# Altium PCB SerialBoard.PcbDoc
Units mil, origin at the board's own origin, x right, y up, seen from the top; angles counter-clockwise.
Board outline 2850 x 1640 mil, 2 copper layers (Top Layer, Bottom Layer); 27 components, 37 nets, 157 pads, 16 vias.
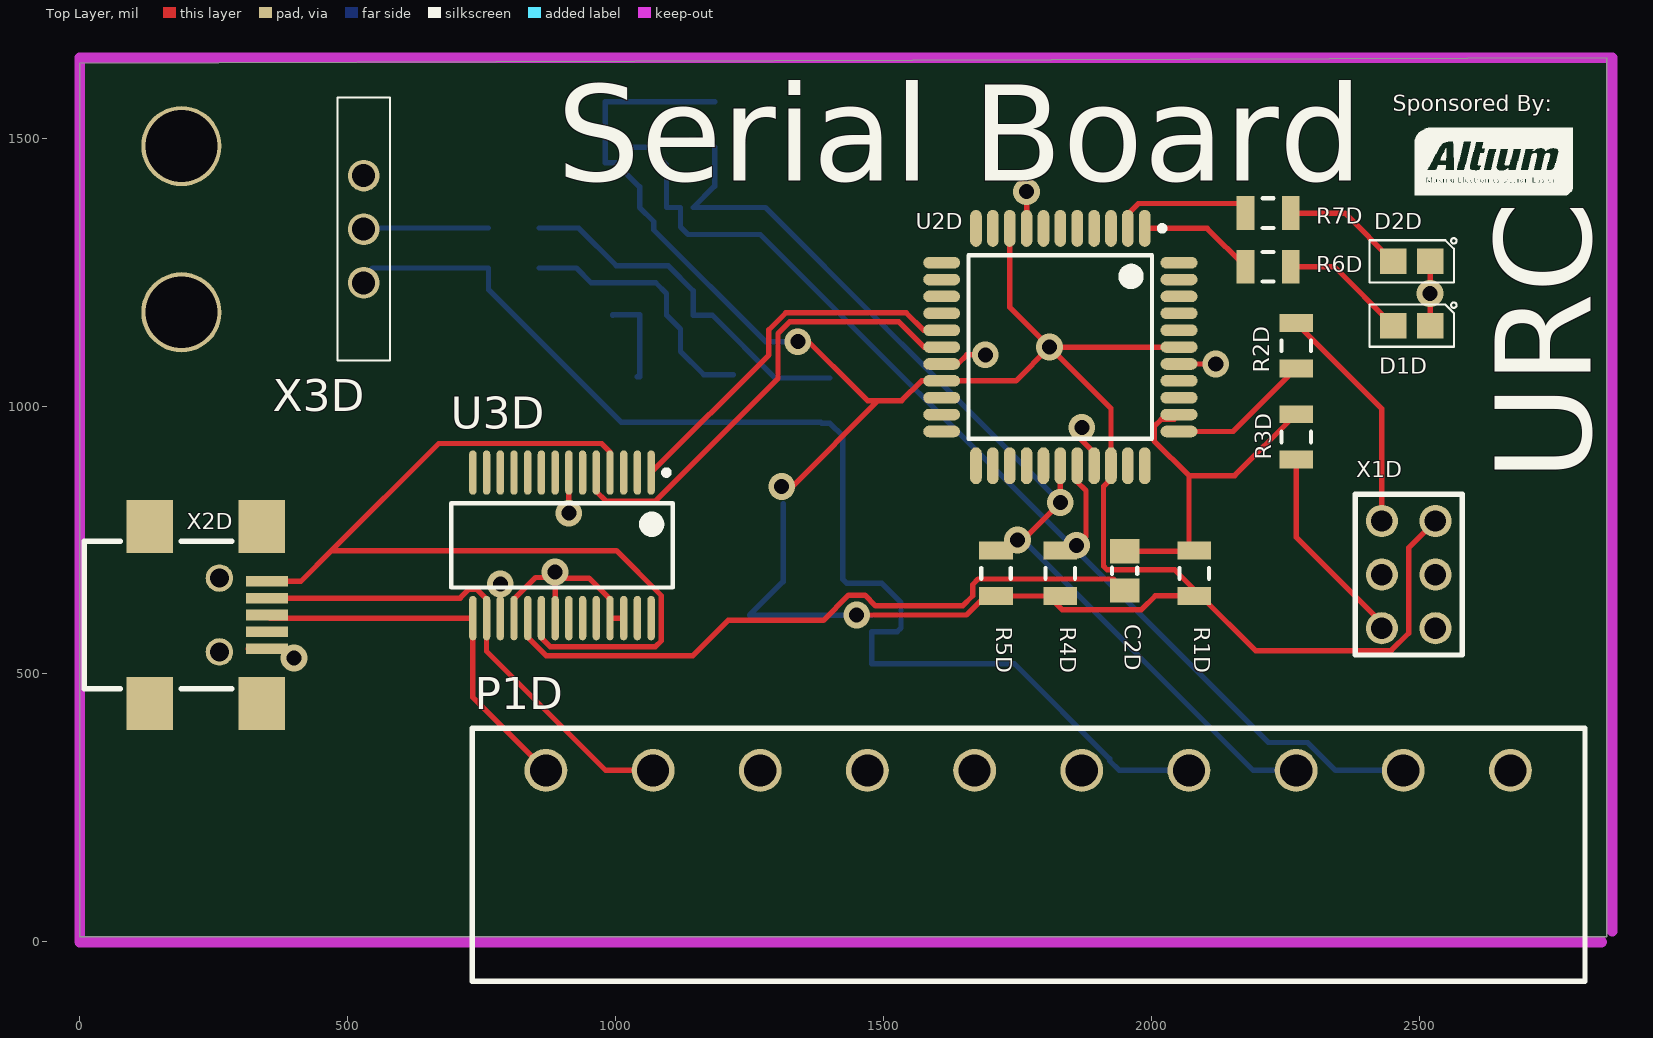
[diagram p0: Top Layer view]
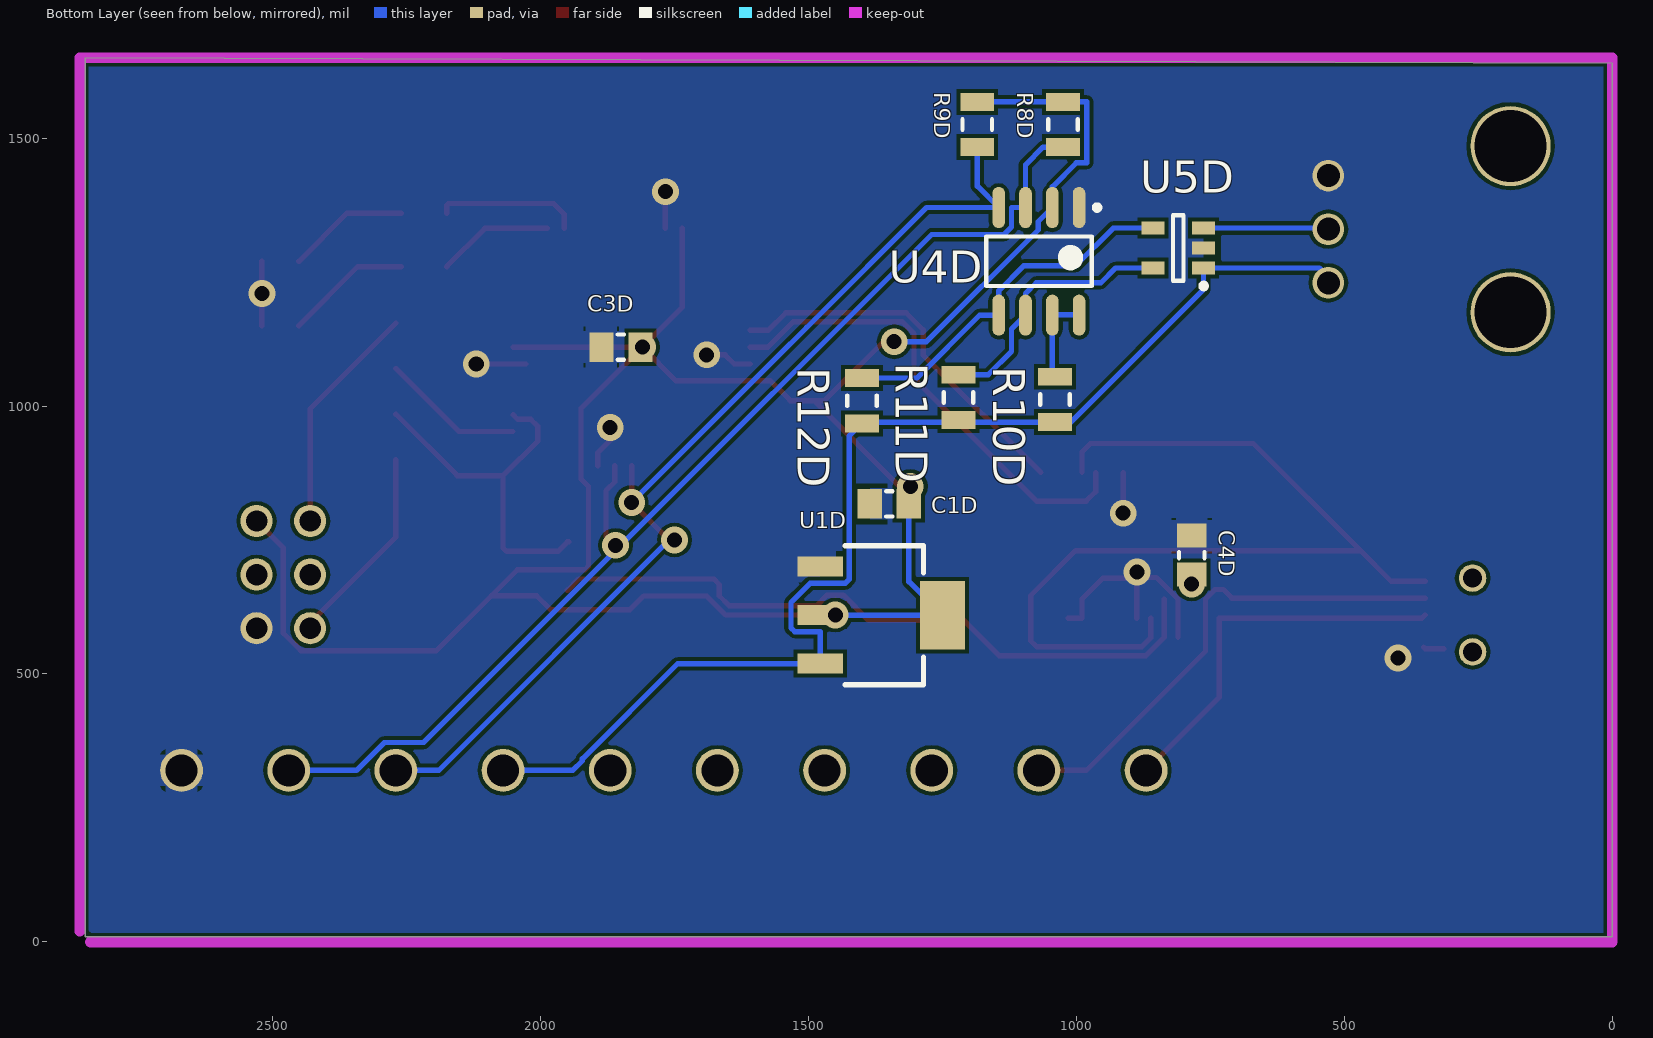
[diagram p1: Bottom Layer view, seen from below]

## Layer stack, top to bottom
Top Solder: solder mask 0.4, Solder Resist, Dk 3.5
Top Layer: signal copper 1.4
Dielectric 1: dielectric 12.6, FR-4, Dk 4.8
Bottom Layer: signal copper 1.4
Bottom Solder: solder mask 0.4, Solder Resist, Dk 3.5

## Board outline
0,1640 0,10 2850,10 2850,1650

## Design rules (kind name [scope] priority, off if disabled: settings)
Clearance [All] p1: gap=7 ignorepadtopadclearanceinfootprint=FALSE except(0: Arc-Hole Track-Hole SMDPad-Hole THPad-Hole Via-Hole Fill-Hole Poly-Hole Region-Hole Text-Hole)
HoleSize [All] p1: absolutevalues=TRUE maxlimit=77520.16 minlimit=15 maxpercent=80.000 minpercent=20.000
MatchedLengths MatchLengths_U2D_Passives_U3D [InxSignalClass('xSignals_U2D_Passives_U3D_MatchLengthsClass')] p1: tolerance=100 checknetsindiffpair=FALSE checkdiffpairvsdiffpair=TRUE checkxsignals=TRUE checkothers=TRUE
MatchedLengths MatchLengths_xSignals_U2D_Passives [InxSignalClass('xSignals_U2D_Passives_MatchLengthsClass')] p2: tolerance=100 checknetsindiffpair=FALSE checkdiffpairvsdiffpair=TRUE checkxsignals=TRUE checkothers=TRUE
MatchedLengths MatchLengths_xSignals_U2D_U3D [InxSignalClass('xSignals_U2D_U3D_MatchLengthsClass')] p3: tolerance=100 checknetsindiffpair=FALSE checkdiffpairvsdiffpair=TRUE checkxsignals=TRUE checkothers=TRUE
MinimumSolderMaskSliver [All] p1: minsoldermaskwidth=0
PolygonConnect GND [InNet('GND')] p1: connectstyle=Relief reliefconductorwidth=60 reliefentries=4 polygonreliefangle="90 Angle" airgapwidth=10
PolygonConnect "Direct Connect GND Vias" [IsVia vs InNet('GND')] p2: connectstyle=Direct reliefconductorwidth=10 reliefentries=4 polygonreliefangle="90 Angle" airgapwidth=10
PolygonConnect [All] p3: connectstyle=Relief reliefconductorwidth=10 reliefentries=4 polygonreliefangle="90 Angle" airgapwidth=10
RoomDefinition "Depth Sensor" [InComponentClass('Depth Sensor')] p1: confinementstyle=ConfineIn formatcopy=TRUE lockcomponents=FALSE outline 10,840 1550,840 1550,1619.72 10,1619.72
RoomDefinition "Serial Board Overview" [InComponentClass('Serial Board Overview')] p2: confinementstyle=ConfineIn formatcopy=TRUE lockcomponents=FALSE outline 1130,460 1560,460 1560,860 1130,860
RoomDefinition "ATXMega32 Master" [InComponentClass('ATXMega32 Master')] p3: confinementstyle=ConfineOut formatcopy=TRUE lockcomponents=FALSE outline -870,-1190 1130,-1190 1130,-190 -870,-190
RoomDefinition "USB to Serial" [InComponentClass('USB to Serial')] p4 off: confinementstyle=ConfineOut formatcopy=TRUE lockcomponents=FALSE outline 1222.52,-1170 1960,-1170 1960,-730 1222.52,-730
RoutingVias [All] p1: holewidth=28 width=50 viastyle="Through Hole" minholewidth=4 minwidth=18 maxholewidth=28 maxwidth=50
SilkToSolderMaskClearance [IsPad] p1: minsilkscreentomaskgap=0 clearancetoexposedcopper=TRUE
SolderMaskExpansion "Tented Vias" [IsVia] p1: expansion=-50
SolderMaskExpansion [All] p2: expansion=5
Width [All] p1: maxlimit=10 minlimit=10 preferedwidth=10
27 further rules are at their usual default settings.

## Classes and differential pairs
component class "Serial Board Overview": C1D U1D
component class "Depth Sensor": R8D R9D R10D R11D R12D U4D U5D X3D

## Components (designator, comment, footprint, x,y, rotation, side; value= is the part's Value field where it differs from the comment)
C1D ".1uF" C0805 1349.13,817.32 r0 bottom value=10uF
C2D "Cap" C0805 1950,692.36 r90 top value=0.1uF
C3D "Cap" C0805 1850,1110 r180 bottom value=0.47uF
C4D "Cap" C0805 784.84,721.81 r90 bottom value=0.100nF
D1D "LED" LED0805 2485.55,1150 r90 top
D2D "LED" LED0805 2485.55,1270 r90 top
P1D "MSTBA 2,5/10-G-5,08" "MSTBA 2,5/10-G-5,08" 870,320 r0 top
R1D "Resistor" R0805 2080,687.68 r270 top value=1K
R2D "Resistor" R0805 2270,1112.32 r90 top value=1K
R3D "Resistor" R0805 2270,942.32 r270 top value=1K
R4D "Resistor" R0805 1830,687.68 r270 top value=470
R5D "Resistor" R0805 1710,687.68 r270 top value=470
R6D "Resistor" R0805 2217.68,1260 r180 top value=68
R7D "Resistor" R0805 2217.68,1360 r180 top value=68
R8D "Resistor" R0805 1025,1525.35 r90 bottom value=1K
R9D "Resistor" R0805 1185,1525.35 r90 bottom value=1K
R10D "Resistor" R0805 1040,1012.32 r270 bottom value=200K
R11D "Resistor" R0805 1220,1016 r270 bottom value=1K
R12D "Resistor" R0805 1400,1010 r270 bottom value=1K
U1D "AP1117E33G-13" AP1117 1364.17,609.65 r270 bottom
U2D "ATxmega32A4" ATxmegaA4-TQFP44 1830,1110 r270 top
U3D "FT232RL-Reel" SSOP-28_N 900,740 r270 top
U4D "PCA9306" PCA9306-SO8 1070,1270 r270 bottom
U5D "" MCP3221-SOT23-5 810,1294.84 r0 bottom
X1D "Header" "2X3 HEADER" 2480,685.39 r270 top
X2D "USB Mini Jack" UX60-MB-5ST 240,610 r270 top
X3D "70555-0037" 70555-0037 530,1330 r90 top

## Footprints (in the part's own frame and the unit in brackets; to place one, negate y for a bottom-side part, rotate by r counter-clockwise, add the part's x,y. Pads: shape width x height; smd on the part's side, far side on the other; paste and mask are expansions set on the pad)
"2X3 HEADER" [mil]
  round 60 hole 40: 1(-100,-50) 2(-100,50) 3(0,-50) 4(0,50) 5(100,-50) 6(100,50)
  silkscreen extent -150,-100 150,100, body extent -150,-100 150,100, height 374
70555-0037 [mm] "Molex C-Grid SL 70555, 3 Pin"
  round 1.5 hole 1.09: 1(-2.54,0) 2(0,0) 3(2.54,0)
  round 3.8 hole 3.4: M1(-3.94,8.64) M2(3.94,8.64)
  silkscreen extent -6.23,-1.25 6.25,1.25, body extent -5.71,-0.76 5.71,12.83, height 7.06
AP1117 [mm] "SOT223-3L"
  rect 0.95x2.15 smd: GND(-2.3,-2.9) VIN(2.3,-2.9) VOUT(0,-2.9)
  rect 3.25x2.15 smd: VOUT(0,2.9)
  silkscreen extent -3.3,-1.7 3.3,2, body extent -3.25,-3.47 3.25,3.47, height 1.6
ATxmegaA4-TQFP44 [mm] "TQFP, 44-Leads, Body 12.3x12.3mm (max), Pitch 0.80mm, IPC Medium Density"
  oval 1.75x0.55 smd: 1(-5.625,4) 2(-5.625,3.2) 3(-5.625,2.4) 4(-5.625,1.6) 5(-5.625,0.8) 6(-5.625,0) 7(-5.625,-0.8) 8(-5.625,-1.6) 9(-5.625,-2.4) 10(-5.625,-3.2) 11(-5.625,-4) 23(5.625,-4) 24(5.625,-3.2) 25(5.625,-2.4) 26(5.625,-1.6) 27(5.625,-0.8) 28(5.625,0) 29(5.625,0.8) 30(5.625,1.6) 31(5.625,2.4) 32(5.625,3.2) 33(5.625,4)
  oval 0.55x1.75 smd: 12(-4,-5.625) 13(-3.2,-5.625) 14(-2.4,-5.625) 15(-1.6,-5.625) 16(-0.8,-5.625) 17(0,-5.625) 18(0.8,-5.625) 19(1.6,-5.625) 20(2.4,-5.625) 21(3.2,-5.625) 22(4,-5.625) 34(4,5.625) 35(3.2,5.625) 36(2.4,5.625) 37(1.6,5.625) 38(0.8,5.625) 39(0,5.625) 40(-0.8,5.625) 41(-1.6,5.625) 42(-2.4,5.625) 43(-3.2,5.625) 44(-4,5.625)
  silkscreen extent -5.75,-4.35 4.35,4.95, body extent -5,-5 5,5, height 1.2
C0805 [mm] "Chip Capacitor, 2-Leads, Body 2.0x1.3mm, IPC Medium Density"
  rect 1.15x1.4 smd: 1(-0.925,0) 2(0.925,0)
  silkscreen extent -0.15,-0.6 0.15,0.6, body extent -1,-0.63 1,0.63, height 0.6
LED0805 [mm] "0805 LED"
  rect 1.2x1.25 smd: 1(0,-0.875) 2(0,0.875)
  silkscreen extent -1,-2.13 1.1,2
MCP3221-SOT23-5 [mm] "MCP3221 12 bit ADC, SOT23-5"
  rect 1.1x0.6 smd: AIN(-1.2,-0.95) SCL(1.2,0.95) SDA(1.2,-0.95) VDD(-1.2,0.95) VSS(-1.2,0)
  silkscreen extent -1.32,-1.55 0.25,1.92, body extent -0.87,-1.55 0.87,1.55, height 1.45
"MSTBA 2,5/10-G-5,08" [mm] "Header, Male, 10 Pin, 90deg"
  round 2.03 hole 1.53: 1(0,0) 2(5.08,0) 3(10.16,0) 4(15.24,0) 5(20.32,0) 6(25.4,0) 7(30.48,0) 8(35.56,0) 9(40.64,0) 10(45.72,0)
  silkscreen extent -3.5,-10 49.25,2, body extent -3.52,-10 49.27,2, height 8.6
PCA9306-SO8 [mm] "PCA9306, Bidirection level translator"
  oval 1.95x0.6 smd: EN(2.55,1.905) GND(-2.55,1.905) SCL1(-2.55,-0.635) SCL2(2.55,-0.635) SDA1(-2.55,-1.905) SDA2(2.55,-1.905) VREF1(-2.55,0.635) VREF2(2.55,0.635)
  silkscreen extent -2.67,-2.5 1.18,2.88, body extent -2,-2.5 2,2.5, height 1.75
R0805 [mm] "Chip Resistor, 2-Leads, Body 2.0x1.5mm, IPC Medium Density"
  rect 0.85x1.6 smd: 1(-1.075,0) 2(1.075,0)
  silkscreen extent -0.25,-0.7 0.25,0.7, body extent -1,-0.75 1,0.75, height 0.55
SSOP-28_N [mm] "SOP, 28-Leads, Body 10.2x5.3mm, Pitch 0.65mm, IPC Medium Density"
  oval 2.1x0.35 smd: 1(-3.45,4.225) 2(-3.45,3.575) 3(-3.45,2.925) 4(-3.45,2.275) 5(-3.45,1.625) 6(-3.45,0.975) 7(-3.45,0.325) 8(-3.45,-0.325) 9(-3.45,-0.975) 10(-3.45,-1.625) 11(-3.45,-2.275) 12(-3.45,-2.925) 13(-3.45,-3.575) 14(-3.45,-4.225) 15(3.45,-4.225) 16(3.45,-3.575) 17(3.45,-2.925) 18(3.45,-2.275) 19(3.45,-1.625) 20(3.45,-0.975) 21(3.45,-0.325) 22(3.45,0.325) 23(3.45,0.975) 24(3.45,1.625) 25(3.45,2.275) 26(3.45,2.925) 27(3.45,3.575) 28(3.45,4.225)
  silkscreen extent -3.57,-5.25 2,5.25, body extent -2.8,-5.25 2.8,5.25, height 2
UX60-MB-5ST [mm] "USB, mini B, right angle, surface mount"
  rect 0.5x2 smd: 1(-1.6,2.775) 2(-0.8,2.775) 3(0,2.775) 4(0.8,2.775) 5(1.6,2.775)
  rect 2.5x2.2 smd: M1(-4.2,-2.775) M2(4.2,-2.775) M3(4.2,2.525) M4(-4.2,2.525)
  round 1.3 hole 0.9: M5(-1.75,0.525) M6(1.75,0.525)
  silkscreen extent -3.5,-5.88 3.5,1.13, body extent -5,-5.5 5,3.4, height 3.95

## Part data
C1D: library part Cap, "Unpolarized Capacitor", Capacitance="10 F", Capacitance Tolerance=10%, Ceramic Capacitor Case="0805 [2012 Metric]", Dielectric Characteristic=X7, Manufacturer 1="TAIYO YUDEN", Manufacturer Part Number=JMK212B7106KG-T, Supplier Part Number 1=84R9126, Voltage Rating=6.3, ComponentLink1Description=http://www.farnell.com/datasheets/1910934.pdf, ComponentLink1URL=http://www.farnell.com/datasheets/1910934.pdf, Description 1="TAIYO YUDEN - JMK212B7106KG-T - CERAMIC CAPACITOR, 10UF, 6.3V, X7R, 10%, 0805", ESR=<20ohm, Packaging="Cut Tape", Pricing 1="1=0.13, 10=0.12, 50=0.112, 100=0.105, 500=0.083, 1000=0.068 (USD)", Product Range="M Series", RoHS=YES, Stock 1=492, Supplier 1=Newark
C2D C3D C4D: "Unpolarized Capacitor"
P1D: "Header, 10-Pin", Manufacturer 1="PHOENIX CONTACT", Manufacturer Part Number="MSTBA 2,5/10-G-5,08-LR", Supplier Part Number 1=88W5041, ComponentLink1Description=http://www.farnell.com/datasheets/1702208.pdf, ComponentLink1URL=http://www.farnell.com/datasheets/1702208.pdf, Description 1="PHOENIX CONTACT - MSTBA 2,5/10-G-5,08-LR - TERMINAL BLOCK, HEADER, 10POS, TH", Pricing 1="1=3.07, 100=2.89, 250=2.67, 500=2.55, 1000=2.27 (USD)", RoHS=YES, Stock 1=37, Supplier 1=Newark, URL=http://www.mouser.com/ProductDetail/Phoenix-Contact/1792708/?qs=sGAEpiMZZMsDddcp1dBDJI66tvLKBAoKnRJwuCPjeJk%3d
R1D R2D R3D R4D R5D R6D R7D R8D R9D R10D R11D R12D: library part Res, Tolerance=5%
U1D: "3.3V 1A Linear Regulator", Dropout Voltage Vdo=1.3, Input Voltage Max=18, Input Voltage Min=4.8, LDO Regulator Case Style=SOT-223, Manufacturer 1="DIODES INC.", Operating Temperature Min=0, Output Current=1, Output Voltage Nom.=3.3, Supplier Part Number 1=79R5845, ComponentLink1Description=http://www.farnell.com/datasheets/608751.pdf, ComponentLink1URL=http://www.farnell.com/datasheets/608751.pdf, Description 1="DIODES INC. - AP1117E33G-13 - IC, LDO, REG, 3.3V, SOT223", Manufacturer Part Number=AP1117E33G-13, No. of Pins=3, Pricing 1="1=0.444, 10=0.324, 100=0.204, 250=0.151, 500=0.123, 1000=0.095 (USD)", RoHS=YES, Stock 1=8573, Supplier 1=Newark
U2D: library part ATxmegaA4, Manufacturer 1=ATMEL, Manufacturer Part Number=ATXMEGA32A4-AU, MCU Case Style=TQFP, Supplier Part Number 1=68T3938, Supply Voltage Min=1.6, ComponentLink1Description=http://www.farnell.com/datasheets/1734580.pdf, ComponentLink1URL=http://www.farnell.com/datasheets/1734580.pdf, ComponentLink2Description=http://www.farnell.com/cad/1773773.zip, ComponentLink2URL=http://www.farnell.com/cad/1773773.zip, ComponentLink3Description=http://bcove.me/gu8hm7kh, ComponentLink3URL=http://bcove.me/gu8hm7kh, Controller Family/Series=ATxmega, CPU Speed=32, Description 1="ATMEL - ATXMEGA32A4-AU - MICROCONTROLLER MCU, 8 BIT, AVR XMEGA, 32MHZ, TQFP-44", No. of I/O's=34, No. of Pins=44, Pricing 1="1=6.13, 10=5.5, 25=5.01, 50=4.54, 100=4.24, 250=4.11, 500=3.8, 1000=3.53 (USD)", Program Memory Size=32, RAM Memory Size=4, RoHS=YES, Stock 1=376, Supplier 1=Newark
U3D: "USB UART Asynchronous Serial Data Transfer Chip, 28-pin SSOP, Tape and Reel", Manufacturer=FTDI, ComponentLink1Description="Manufacturer URL", ComponentLink1URL=http://www.ftdichip.com/, ComponentLink2Description=Datasheet, ComponentLink2URL=http://www.ftdichip.com/Support/Documents/DataSheets/ICs/DS_FT232R.pdf, DatasheetVersion="ver 2.10, Mar-2012", PackageDescription="28-Pin Small Outline Package 0.65 mm Pitch", PackageReference=SSOP-28, PackageVersion=Mar-12, PartNumber=FT232RL-Reel
U4D: "PCA9306, Bidirectional level translator", Interface Case Style=SOIC, Manufacturer=NXP, Manufacturer Part Number=PCA9306D,118, Operating Temperature Min="-40 C", Supplier Part Number 1=70R6428, Supply Voltage Max=3.6, Supply Voltage Min=1, ComponentLink1Description=http://www.nxp.com/packings/SOT96-1_118.html, ComponentLink1URL=http://www.nxp.com/packings/SOT96-1_118.html, ComponentLink2Description=http://www.farnell.com/cad/1549203.zip, ComponentLink2URL=http://www.farnell.com/cad/1549203.zip, ComponentLink3Description=http://www.farnell.com/datasheets/1805226.pdf, ComponentLink3URL=http://www.farnell.com/datasheets/1805226.pdf, IC Interface Type=I2, Interface Applications=-, No. of Pins=8, Packaging="Cut Tape", Pricing 1="1=0.346, 10=0.346, 25=0.346, 100=0.346, 250=0.317, 500=0.317, 1000=0.293, 2500=0.272 (USD)", RoHS=YES, Stock 1=3293, Supplier 1=Newark
U5D: library part MCP3221, "MCP3221, 12 bit ADC, I2C", ADC / DAC Case Style=SOT-23, Manufacturer=MICROCHIP, Manufacturer Part Number=MCP3221A5T-I/OT, Supplier Part Number 1=92C2410, Supply Voltage Max=5.5, Supply Voltage Min=2.7, Supply Voltage Type=Single, ComponentLink1Description=http://www.farnell.com/cad/1545531.zip, ComponentLink1URL=http://www.farnell.com/cad/1545531.zip, ComponentLink2Description=http://www.farnell.com/datasheets/12186.pdf, ComponentLink2URL=http://www.farnell.com/datasheets/12186.pdf, No. of Pins=5, Pricing 1="1=1.44, 26=1.2, 100=1.09 (USD)", Resolution (Bits)=12, RoHS=YES, Sampling Rate=22.3, Stock 1=2165, Supplier 1=Newark
X1D: library part "2x3 Header", "2x3 Header", Manufacturer 1=FCI, Manufacturer Part Number=67996-406HLF, Supplier Part Number 1=20M2191, ComponentLink1Description=http://www.farnell.com/datasheets/1876884.pdf, ComponentLink1URL=http://www.farnell.com/datasheets/1876884.pdf, Contact Plating="Tin Plated Contacts", Contact Termination Type="Through Hole", Description 1="FCI - 67996-406HLF - BOARD-BOARD CONNECTOR HEADER, 6 POSITION, 2ROW", Gender=Header, No. of Contacts=6, No. of Rows=2, Pitch Spacing=2.54, Pricing 1="1=0.254, 10=0.218, 25=0.186, 50=0.178, 100=0.16, 250=0.153, 500=0.128, 1000=0.117 (USD)", Product Range="BergStik 67996 Series", RoHS=YES, Stock 1=441, Supplier 1=Newark
X2D: library part USB-MINI, "USB Mini connector", Manufacturer 1="TE CONNECTIVITY", Manufacturer Part Number=1734035-2, Supplier Part Number 1=16M3869, ComponentLink1Description=http://www.farnell.com/datasheets/1650952.pdf, ComponentLink1URL=http://www.farnell.com/datasheets/1650952.pdf, ComponentLink2Description=http://www.farnell.com/cad/1650238.tif, ComponentLink2URL=http://www.farnell.com/cad/1650238.tif, ComponentLink3Description=http://www.farnell.com/datasheets/1665303.pdf, ComponentLink3URL=http://www.farnell.com/datasheets/1665303.pdf, Description 1="TE CONNECTIVITY - 1734035-2 - MINI USB, 2.0 TYPE B, RECEPTACLE, SMT", Pricing 1="1=1.08, 25=0.989, 50=0.989, 100=0.989, 200=0.989 (USD)", RoHS=YES, Stock 1=6729, Supplier 1=Newark
X3D: "Molex, C-Grid SL 70555, 3 Pin", Manufacturer=MOLEX, Supplier Part Number 1=59H2958, ComponentLink1Description=http://www.farnell.com/cad/1737917.pdf, ComponentLink1URL=http://www.farnell.com/cad/1737917.pdf, ComponentLink2Description=http://www.farnell.com/datasheets/1947503.pdf, ComponentLink2URL=http://www.farnell.com/datasheets/1947503.pdf, ComponentLink3Description=http://www.farnell.com/cad/1980011.zip, ComponentLink3URL=http://www.farnell.com/cad/1980011.zip, Contact Plating="Gold Plated Contacts", Contact Termination Type="Through Hole", Gender=Header, No. of Contacts=3, No. of Rows=1, Pitch Spacing=2.54, Pricing 1="1=0.679, 10=0.622, 100=0.575, 500=0.575, 1000=0.534, 2000=0.495, 5000=0.484, 10000=0.47 (USD)", Product Range="SL 70555 Series", RoHS=YES, Stock 1=1580, Supplier 1=Newark

## Via types
v1: diameter 50, hole 28, Top Layer to Bottom Layer, 16 vias

## Nets (pads, with @x,y where several pads share a name; then routed paths per layer and width w, separated by ;. In a path a pad name is that pad's centre, name@x,y a point inside that pad or via, vN(x,y) a via of type N, cw(c..) or ccw(c..) an arc to the next point about the centre after c; other vN are vias at no path point)
3V3: C1D.1 C3D.2 R1D.2 R4D.2 R5D.2 R8D.2 R9D.2 U1D.VOUT U2D.9 U2D.19 U2D.31 U2D.39 U4D.VREF1 X1D.2 | length 4652.4
  Top Layer w10: v1(1310,850) 1330,850 1490,1010 ; v1(1340,1120) 1340,1140 1470,1010 1490,1010 ; v1(1450,610) 1654.65,610 1690,645.36 1807.68,645.36 1833.03,620 1981.22,620 2007.2,645.97 R1D.2@2091.7,645.97 ; U2D.9 1735.51,1184.49 v1(1810,1110) ; U2D.39 v1(1810,1110) ; X1D.2 2480,735.39 2480,576 2447.4,543.39 2194.28,543.39 R1D.2@2091.7,645.97 ; 1490,1010 1533.75,1010 1570.76,1047.01 U2D.19 1747.01,1047.01 v1(1810,1110) ; v1(1810,1110) 1924.49,995.51 U2D.31 1924.49,864.14 1910.44,850.09 1910.44,701.17 1917.47,694.14 2043.54,694.14 R1D.2@2091.7,645.97
  Bottom Layer w10: R9D.2 1184.68,1568 1025.32,1568 R8D.2 981,1567.68 981,1454 1000,1454 1045,1409 U4D.VREF1 1071.19,1344.2 1071.19,1328.81 1280,1120 v1(1340,1120) ; C1D.1 1312.72,672.36 1250,609.65 U1D.VOUT@1478.35,609.65
5V: P1D.7 R10D.2 R11D.2 R12D.2 U1D.VIN U5D.VDD X3D.1 | length 2297.4
  Bottom Layer w10: X3D.1@523.78,1234.84 546.38,1257.44 U5D.VDD 762.76,1217.24 1010,970 R10D.2 1382.68,970 1385,967.68 R12D.2 1424.02,943.65 1424.02,676.52 1431.05,669.5 1496.49,669.5 1532.67,633.32 1532.67,585.97 1525.64,578.95 1478.35,578.95 U1D.VIN 1744.39,519.09 1921.96,341.52 1921.96,338.04 1940,320 P1D.7
5V_SCL: R11D.1 U4D.SCL2 U5D.SCL | length 493.3
  Bottom Layer w10: U5D.SCL 927,1257.44 954.44,1230 1075,1230 1095,1210 U4D.SCL2 1121.19,1143.42 1121.19,1101.84 1164.7,1058.32 R11D.1
5V_SDA: R12D.1 U4D.SDA2 U5D.SDA | length 685.3
  Bottom Layer w10: U5D.SDA 931,1332.24 1001.24,1262 1098,1262 1145,1215 U4D.SDA2 1180.39,1169.61 1297.68,1052.32 R12D.1
D+: P1D.1 U3D.15 X2D.3 | length 727.5
  Top Layer w10: X2D.3 355.08,604.17 U3D.15 733.66,456.34 P1D.1
D-: P1D.2 U3D.16 X2D.2 | length 924.2
  Top Layer w10: X2D.2 709.82,641.5 725.84,657.51 741.49,657.51 759.25,639.75 U3D.16 759.25,542.36 981.61,320 P1D.2
GND: C1D.2 C3D.1 C4D.2 D1D.1 D2D.1 P1D.10 U1D.GND U2D.8 U2D.18 U2D.30 U2D.38 U3D.7 U3D.18 U3D.21 U3D.25 U3D.26 U4D.GND U5D.VSS X1D.6 X2D.5 X3D.3 | length 1014.7
  Top Layer w10: X2D.5@314.56,547.01 X2D.5 X2D.5@352.24,550 ; U3D.18@810.43,568.6 U3D.18 810.43,639.75 850.69,680 877.2,680 v1(887.2,690) ; U3D.21 v1(887.2,690) ; v1(912.8,800) U3D.7 ; U3D.26 U3D.25 989.57,639.75 950.41,678.9 898.31,678.9 v1(887.2,690) ; U2D.18 1638.5,1078.5 1655.49,1095.49 v1(1690,1095.49) v1@1700.05,1095.49 ; U2D.8 v1(1767.01,1400) ; v1(1870,960) 1870,935.94 1892.99,912.95 U2D.30 ; U2D.38@2027.05,1078.5 U2D.38 v1(2120,1078.5) ; D1D.1 v1(2520,1210) D2D.1
  other v1: 400,530
LED1: R6D.2 U2D.1 | length 217.5
  Top Layer w10: U2D.1 2103.9,1331.46 R6D.2
LED2: R7D.2 U2D.2 | length 270.4
  Top Layer w10: U2D.2 1955.98,1358.35 1975.54,1377.9 2172.1,1377.9 2175.35,1374.65 R7D.2
NetC4D_1: C4D.1 U3D.17
  other v1: 784.84,668.03
NetD1D_2: D1D.2 R6D.1 | length 236.7
  Top Layer w10: R6D.1 2341.1,1260 D1D.2
NetD2D_2: D2D.2 R7D.1 | length 228.4
  Top Layer w10: R7D.1 2361.1,1360 D2D.2
NetR2D_1: R2D.1 U2D.34 | length 267.2
  Top Layer w10: U2D.34 2152.52,952.52 R2D.1
NetR2D_2: R2D.2 X1D.1 | length 435.5
  Top Layer w10: R2D.2 2430,994.65 X1D.1
NetR3D_2: R3D.2 X1D.5 | length 380.9
  Top Layer w10: R3D.2 2270,755.39 2430,595.39 X1D.5
NetR10D_1: R10D.1 U4D.EN U4D.VREF2 | length 170.7
  Bottom Layer w10: U4D.EN 995,1170 1045,1170 U4D.VREF2 1045,1054.65 R10D.1
NetU2D_3: U2D.3
NetU2D_4: U2D.4
NetU2D_5: U2D.5
NetU2D_6: U2D.6
NetU2D_7: U2D.7
NetU2D_10: U2D.10
NetU2D_11: U2D.11
NetU2D_22: U2D.22
NetU2D_23: U2D.23
NetU2D_24: U2D.24
NetU2D_25: U2D.25
RESET: C2D.1 U3D.19 | length 1296.6
  Top Layer w10: U3D.19@836.02,639.75 U3D.19 836.02,568.6 870.79,533.84 1143.84,533.84 1210,600 1387.67,600 1434.67,647 1465.33,647 1485.33,627 1647.6,627 1666.5,645.9 1666.5,667.06 1676.59,677.14 1928.8,677.14 C2D.1
RESET: C2D.2 R1D.1 R3D.1 U2D.35 | length 689.1
  Top Layer w10: C2D.2@1947.5,746.42 1950,746.42 1967.64,728.78 2063.39,728.78 2070,735.39 2070,870 ; U2D.35 2042.79,975.35 2018.38,975.35 2005.01,961.98 2005.01,934.99 2070,870 ; R3D.1 2155.35,870 2070,870
RS232.IMU.DOWNSTREAM: P1D.3
RS232.IMU.UPSTREAM: P1D.4
SCL: P1D.9 R4D.1 R8D.1 U2D.29 U4D.SCL1 | length 2168.4
  Top Layer w10: v1(1860,740) 1861.61,740 1877.9,756.29 1877.9,842.1 1861.5,858.5 U2D.29
  Bottom Layer w10: R8D.1 1061.97,1483.03 1095,1450 U4D.SCL1 1121.19,1370.39 1121.19,1333.96 1135.14,1320.01 1269.99,1320.01 v1@1860,730 ; v1(1860,740) v1@1860,730 ; P1D.9 2343.48,320 2291.52,371.96 2218.04,371.96 v1@1860,730
SDA: P1D.8 R5D.1 R9D.1 U2D.28 U4D.SDA1 | length 1917.8
  Top Layer w10: v1(1750,750) 1760,750 v1(1830,820) U2D.28
  Bottom Layer w10: R9D.1 1185,1410.39 U4D.SDA1 1279.61,1370.39 1503,1147 1561.16,1088.84 v1(1830,820) ; v1(1750,750) 1760,750 2190,320 P1D.8
SENSE: U5D.AIN X3D.2 | length 240.1
  Bottom Layer w10: X3D.2@523.78,1334.84 526.38,1332.24 U5D.AIN
UART_RX: U2D.16 U3D.1 | length 706.6
  Top Layer w10: U3D.1 1286,1095.49 1286,1142.37 1317.63,1174 1542.37,1174 1574.87,1141.5 U2D.16
UART_RX2: U2D.17 U3D.5 | length 894.7
  Top Layer w10: U3D.5 963.98,840.25 981.74,822.49 1074.16,822.49 1303,1051.33 1303,1135.33 1324.67,1157 1528.67,1157 1575.67,1110 U2D.17
VBUS: U3D.4 U3D.20 X2D.1 | length 1798.3
  Top Layer w10: X2D.1 412.99,672.99 470,730 ; U3D.20 861.61,567.05 877.83,550.84 1074.16,550.84 1085.23,561.9 1085.23,646.45 1001.67,730 470,730 ; U3D.4 989.57,914.44 974.01,930 670,930 470,730
pads on no net: P1D.5 P1D.6 U2D.12 U2D.13 U2D.14 U2D.15 U2D.20 U2D.21 U2D.26 U2D.27 U2D.32 U2D.33 U2D.36 U2D.37 U2D.40 U2D.41 U2D.42 U2D.43 U2D.44 U3D.2 U3D.3 U3D.6 U3D.8 U3D.9 U3D.10 U3D.11 U3D.12 U3D.13 U3D.14 U3D.22 U3D.23 U3D.24 U3D.27 U3D.28 X1D.3 X1D.4 X2D.4 X2D.M1 X2D.M2 X2D.M3 X2D.M4 X2D.M5 X2D.M6 X3D.M1 X3D.M2

## Polygon pours and split planes (outlines as drawn)
GND on Bottom Layer "Bottom Layer-GND Net" (solid, pour order 2): 0,1640 0,10 2850,10 2850,1650

## Keep-outs
Keep-Out Layer:
  lines w20: 2840,0 0,0 0,1650 2860,1650 2860,777.5 2860,20

## Silkscreen, mask and mechanical layers (free items; w line width, h text height)
Top Overlay:
  drawing of 878 lines, arcs and shapes, not listed
  text "2.88 x 1.65 inch" at 950,1730 h120
  text "Sponsored By:" at 2450,1550 h30
  text "Serial Board" at 890,1420 h180
  text "URC" at 2820,860 h180 r90